# EAGLE board model140 (EAGLE 7.7.0)
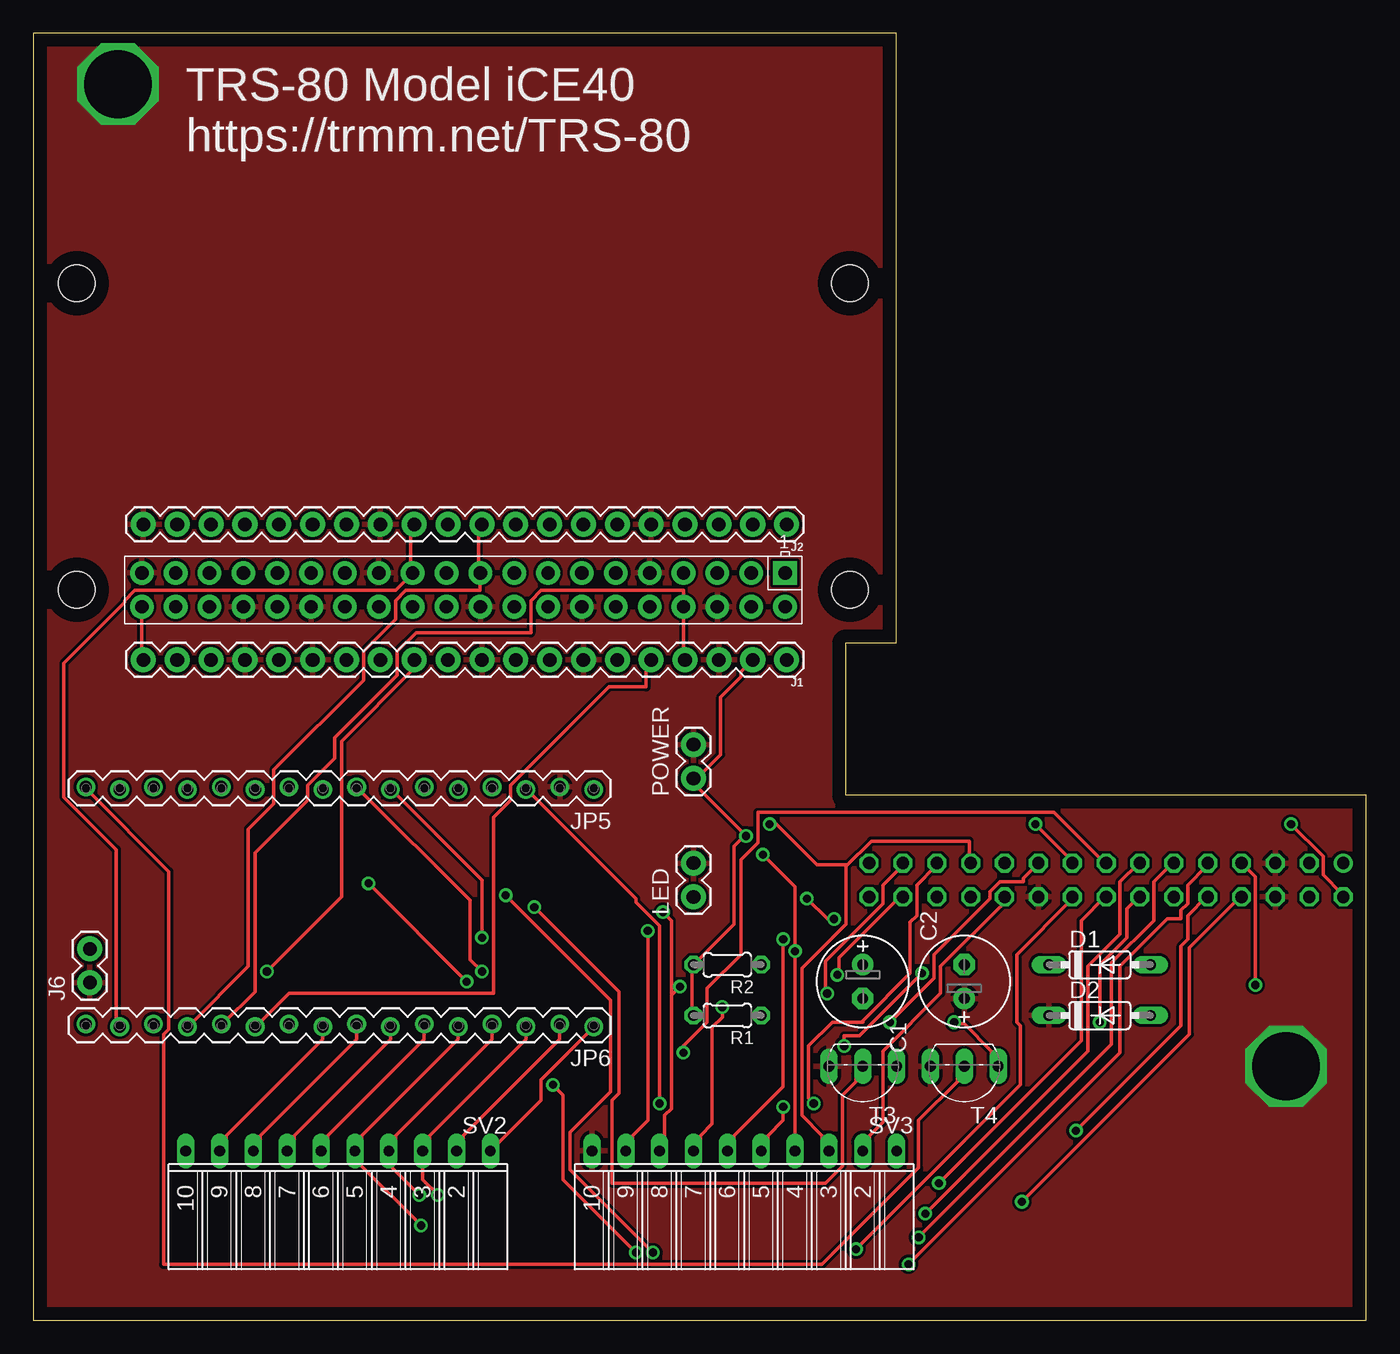
[diagram p0: board, top side]
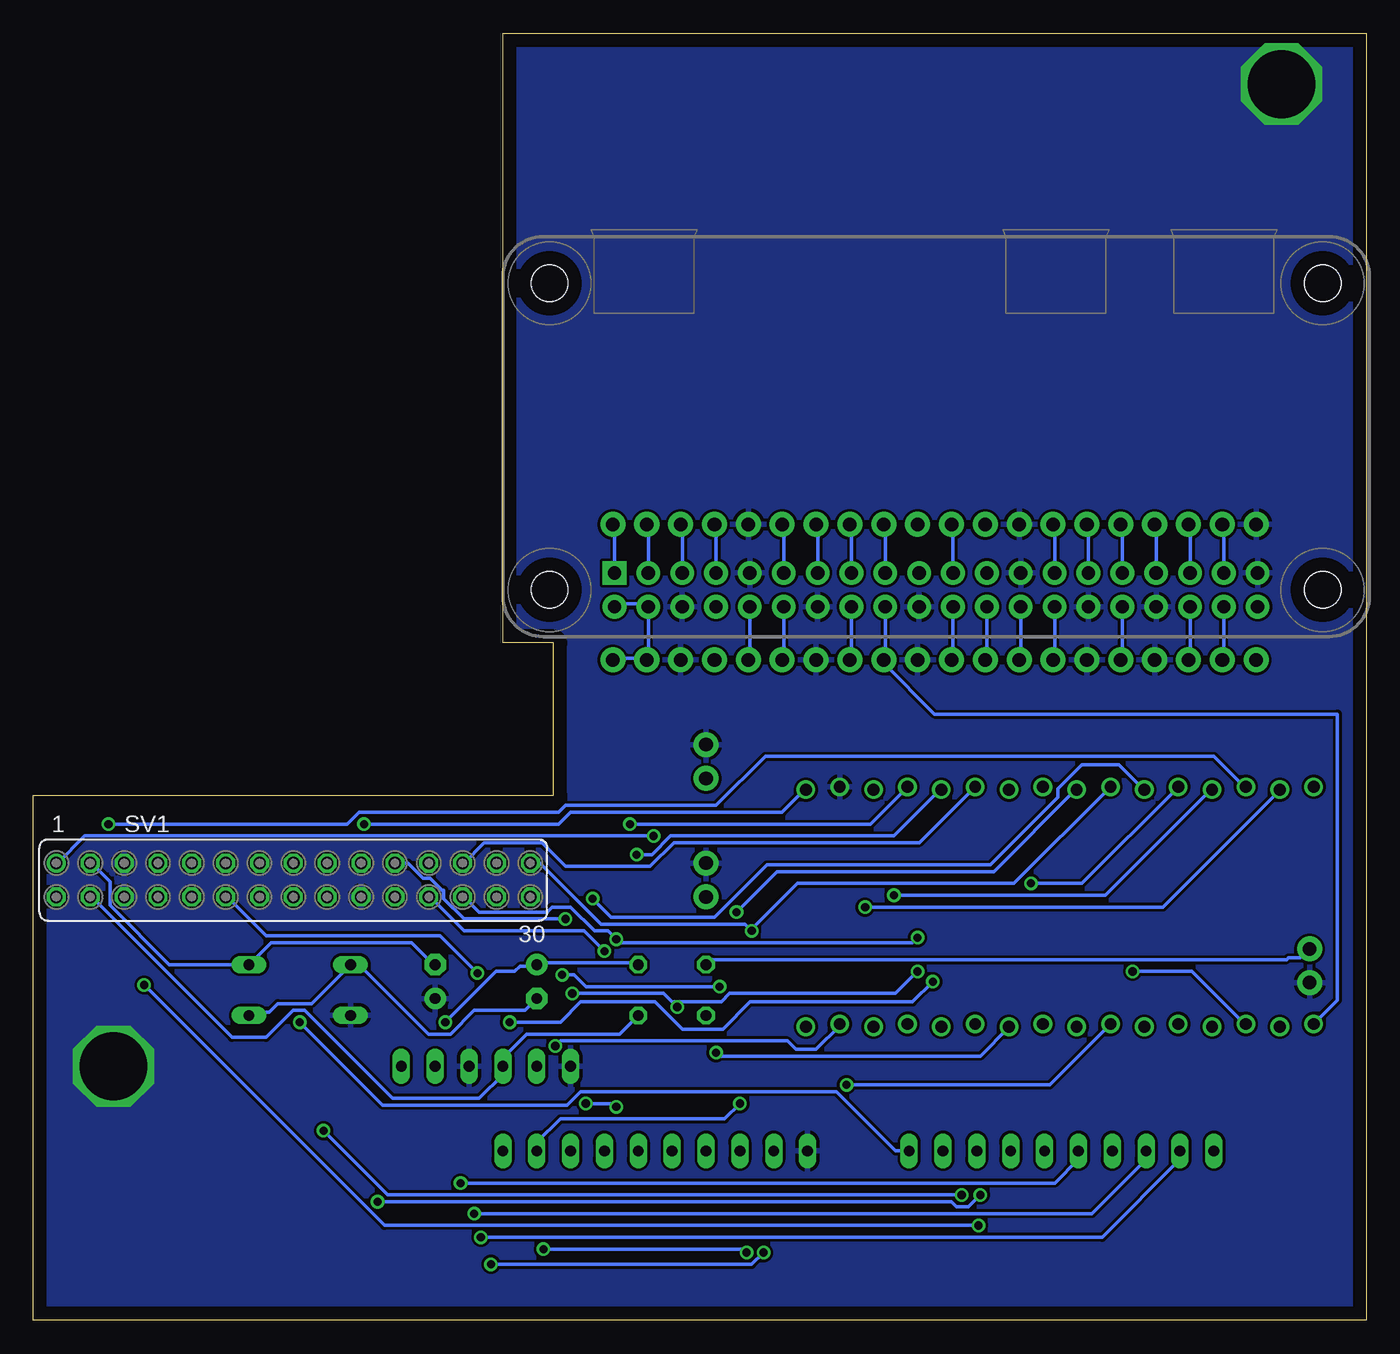
[diagram p1: board, bottom side, seen from below]

Size 100 x 96.52 mm. Coordinates in mm from the lower left corner, seen from the top.
Outline: 0,0 100,0 100,39.36 60.96,39.36 60.96,50.8 64.77,50.8 64.77,96.52 0,96.51 0,0
Copper layers (1*16): Top 0.035mm / dielectric 1.5mm / Bottom 0.035mm
Design rules "default": minimum track width 10mil, minimum drill 24mil, track to track 8mil, track to pad 8mil, pad to pad 8mil, via to via 8mil, smd to smd 8mil, copper to edge 40mil, drill to drill 8mil, minimum pad ring 10mil, minimum via ring 8mil, stop-mask expansion 4mil, vias tented up to drill 0mil, thermal gap 10mil

## Footprints (pad centres in the part's own frame; a part is rotated, then mirrored left to right if it is on the bottom)
E2,5-7 = drill 0.813 pad 1.6: + -1.27,0 | drill 0.813 pad 1.6 octagon: - 1.27,0
DO35-7 = drill 0.813 long: A 3.81,0; C -3.81,0
1X20 = drill 1.016 pad 1.88: 1 0,0; 2 2.54,0; 3 5.08,0; 4 7.62,0; 5 10.16,0; 6 12.7,0; 7 15.24,0; 8 17.78,0; 9 20.32,0; 10 22.86,0; 11 25.4,0; 12 27.94,0; 13 30.48,0; 14 33.02,0; 15 35.56,0; 16 38.1,0; 17 40.64,0; 18 43.18,0; 19 45.72,0; 20 48.26,0
1X02 = drill 1.016 pad 1.88: 1 0,0; 2 2.54,0
1X16_MACHINE-PIN-HEADER_LOCK.004@1 = drill 0.889: 1 0,0.102; 2 2.54,-0.102; 3 5.08,0.102; 4 7.62,-0.102; 5 10.16,0.102; 6 12.7,-0.102; 7 15.24,0.102; 8 17.78,-0.102; 9 20.32,0.102; 10 22.86,-0.102; 11 25.4,0.102; 12 27.94,-0.102; 13 30.48,0.102; 14 33.02,-0.102; 15 35.56,0.102; 16 38.1,-0.102
0204/5 = drill 0.813 octagon: 1 -2.54,0; 2 2.54,0
FE15-2 = drill 0.914: 1 -17.78,1.27 | drill 0.914 octagon: 2 -17.78,-1.27; 3 -15.24,1.27; 4 -15.24,-1.27; 5 -12.7,1.27; 6 -12.7,-1.27; 7 -10.16,1.27; 8 -10.16,-1.27; 9 -7.62,1.27; 10 -7.62,-1.27; 11 -5.08,1.27; 12 -5.08,-1.27; 13 -2.54,1.27; 14 -2.54,-1.27; 15 0,1.27; 16 0,-1.27; 17 2.54,1.27; 18 2.54,-1.27; 19 5.08,1.27; 20 5.08,-1.27; 21 7.62,1.27; 22 7.62,-1.27; 23 10.16,1.27; 24 10.16,-1.27; 25 12.7,1.27; 26 12.7,-1.27; 27 15.24,1.27; 28 15.24,-1.27; 29 17.78,1.27; 30 17.78,-1.27
FE10W = drill 0.813 long: 1 -11.43,0; 2 -8.89,0; 3 -6.35,0; 4 -3.81,0; 5 -1.27,0; 6 1.27,0; 7 3.81,0; 8 6.35,0; 9 8.89,0; 10 11.43,0
TO92-CBE = drill 0.813 long: B 0,0; C -2.54,0; E 2.54,0
RASP_PI_ZERO_BOARD_FULL = drill 1 pad 1.778 square: 1 8.37,25.23 | drill 1 pad 1.778: 2 8.37,27.77; 3 10.91,25.23; 4 10.91,27.77; 5 13.45,25.23; 6 13.45,27.77; 7 15.99,25.23; 8 15.99,27.77; 9 18.53,25.23; 10 18.53,27.77; 11 21.07,25.23; 12 21.07,27.77; 13 23.61,25.23; 14 23.61,27.77; 15 26.15,25.23; 16 26.15,27.77; 17 28.69,25.23; 18 28.69,27.77; 19 31.23,25.23; 20 31.23,27.77; 21 33.77,25.23; 22 33.77,27.77; 23 36.31,25.23; 24 36.31,27.77; 25 38.85,25.23; 26 38.85,27.77; 27 41.39,25.23; 28 41.39,27.77; 29 43.93,25.23; 30 43.93,27.77; 31 46.47,25.23; 32 46.47,27.77; 33 49.01,25.23; 34 49.01,27.77; 35 51.55,25.23; 36 51.55,27.77; 37 54.09,25.23; 38 54.09,27.77; 39 56.63,25.23; 40 56.63,27.77 | hole 2.75: 3.5,3.5; 3.5,26.5; 61.5,3.5; 61.5,26.5

## Placement (x,y rotation side)
C1  [E2,5-7]  62.23,25.4 270 top
C2  [E2,5-7]  69.85,25.4 90 top
D1  1N4148DO35-7  [DO35-7]  80.01,26.67 0 top
D2  1N4148DO35-7  [DO35-7]  80.01,22.86 0 top
J1  [1X20]  56.52,49.53 180 top
J2  [1X20]  56.52,59.69 180 top
J6  [1X02]  4.24,25.32 90 top
JP5  M16MACHIINE-PIN_LOCK  [1X16_MACHINE-PIN-HEADER_LOCK.004@1]  42.04,39.9 180 top
JP6  M16MACHIINE-PIN_LOCK  [1X16_MACHINE-PIN-HEADER_LOCK.004@1]  42.04,22.12 180 top
LED  [1X02]  49.53,31.75 90 top
POWER  [1X02]  49.53,40.64 90 top
R1  [0204/5]  52.07,22.86 180 top
R2  [0204/5]  52.07,26.67 180 top
SV1  [FE15-2]  80.49,33.02 0 bottom
SV2  [FE10W]  22.86,12.7 180 top
SV3  [FE10W]  53.34,12.7 180 top
T3  [TO92-CBE]  62.23,19.05 180 top
T4  [TO92-CBE]  69.85,19.05 180 top
U$1  RPI-ZERO  [RASP_PI_ZERO_BOARD_FULL]  64.77,81.28 180 top

## Library data of the parts
C1 C2 R1 R2 = rcl
D1 D2 = diode
J1 J2 J6 JP5 JP6 LED POWER = SparkFun-Connectors
SV1-SV3 = con-lsta; OC_FARNELL: unknown; OC_NEWARK: unknown
T3 T4 = transistor
U$1 = rpi-zero

## Nets
3V3@1: J2.1 U$1.1
3V3@2: J2.9 U$1.17
+3V3: JP5.1 SV1.17
+5V: J1.1 J1.2 J6.2 POWER.1 R1.2 R2.2 SV1.1 U$1.2 U$1.4
-5V: C2.- D1.A SV1.3
GND: C2.+ D2.C J1.3 J1.7 J1.10 J1.15 J1.17 J2.5 J2.13 J2.20 J6.1 JP5.2 LED.2 POWER.2 SV1.5 SV1.6 SV1.20 SV3.10 T3.E T4.E U$1.6 U$1.9 U$1.14 U$1.20 U$1.25 U$1.30 U$1.34 U$1.39
LCD_BZ: JP5.14 SV1.2
LCD_CONTRAST: R1.1 SV1.4 T3.C
LCD_CS1: JP5.13 SV1.18
LCD_CS20: JP6.1 SV1.14 SV2.1
LCD_CS21: JP6.2 SV1.12 SV2.2
LCD_CS22: JP6.3 SV1.10 SV2.3
LCD_CS23: JP6.4 SV1.8 SV2.4
LCD_CS24: JP6.5 SV1.7 SV2.5
LCD_CS25: JP6.6 SV1.16 SV2.6
LCD_CS26: JP6.7 SV1.15 SV2.7
LCD_CS27: JP6.8 SV1.13 SV2.8
LCD_CS28: JP6.9 SV1.11 SV2.9
LCD_CS29: JP6.10 SV1.9
LCD_D0: JP5.3 SV1.22 SV3.2
LCD_D1: JP5.4 SV1.23 SV3.3
LCD_D2: JP5.5 SV1.24 SV3.4
LCD_D3: JP5.6 SV1.25 SV3.5
LCD_D4: JP5.7 SV1.26 SV3.6
LCD_D5: JP5.8 SV1.27 SV3.7
LCD_D6: JP5.9 SV1.28 SV3.8
LCD_D7: JP5.10 SV1.29 SV3.9
LCD_DI: JP5.11 SV1.21
LCD_E: JP5.12 SV1.19
LED: LED.1
N$1: J2.2 U$1.3
N$2: J2.3 U$1.5
N$3: J2.4 U$1.7
N$4: J2.6 U$1.11
N$5: J2.7 U$1.13
N$6: J2.8 U$1.15
N$7: J2.11 U$1.21
N$8: J2.14 U$1.27
N$9: J2.15 U$1.29
N$10: J2.16 U$1.31
N$11: J2.17 U$1.33
N$12: J2.18 U$1.35
N$13: J2.19 U$1.37
N$14: J1.20 U$1.40
N$15: J1.19 U$1.38
N$16: J1.18 U$1.36
N$17: J1.16 U$1.32
N$18: J1.14 U$1.28
N$19: J1.13 U$1.26
N$20: J1.11 U$1.22
N$21: J1.8 U$1.16
N$22: J1.6 U$1.12
N$27: C1.+ R2.1 T4.C
N$28: C1.- D1.C D2.A
PWM_CONTRAST: JP5.15 T3.B
PWM_NEGV: JP5.16 T4.B
SERIAL_RX: J1.5 JP6.11 U$1.10
SERIAL_TX: J1.4 JP6.12 U$1.8
SPI_CLK: J2.12 JP6.15 U$1.23
SPI_CS: J1.12 JP6.14 U$1.24
SPI_DC: J1.9 JP6.16 U$1.18
SPI_DI: J2.10 JP6.13 U$1.19

## Tracks (layer width: path | path; a pad name or v marks a point on that pad's centre or on a via)
3V3@1
  Bottom 0.254: J2.1 56.39,59.69 56.39,56.13 U$1.1
3V3@2
  Bottom 0.254: J2.9 36.07,59.69 36.07,56.13 U$1.17
+3V3  (via drill 0.61)
  Top 0.254: v75.18,37.21 77.85,34.54 77.85,34.29 SV1.17
  Bottom 0.254: v75.18,37.21 60.58,37.21 59.69,38.1 43.81,38.1 42.16,39.75 JP5.1
+5V  (via drill 0.61)
  Top 0.254: R1.2 49.4,22.99 49.4,26.54 R2.2 52.58,29.72 52.58,35.56 53.34,36.32 v53.47,36.32 49.53,40.26 49.53,40.39 | J1.2 53.09,48.64 53.09,48.26 51.56,46.74 51.56,42.42 49.53,40.39 | 49.53,40.39 POWER.1
  Bottom 0.254: R2.2 49.4,26.67 49.02,27.05 5.97,27.05 5.84,27.18 4.95,27.18 4.32,27.81 J6.2 | U$1.2 56.39,53.59 56.26,53.72 54.1,53.72 53.98,53.59 U$1.4 53.85,53.47 53.85,49.66 53.98,49.66 J1.2 54.1,49.66 55.5,49.66 55.63,49.53 J1.1 | v53.47,36.32 96.14,36.32 98.17,34.29 SV1.1
-5V
  Bottom 0.254: C2.- 69.98,26.67 71.63,28.32 82.17,28.32 D1.A 89.79,26.67 94.23,31.11 94.23,32.89 95.63,34.29 SV1.3
GND  (via drill 5.08 pad 2.54)
  other vias: 6.35,92.71 93.98,19.05
  pour Bottom: 0,96.52 105.41,96.52 105.41,-1.27 0,-1.27
  pour Top: 0,96.52 104.14,96.52 104.14,0 0,0
LCD_BZ  (via drill 0.61)
  Top 0.254: v94.36,37.21 96.77,34.8 96.77,33.4 98.17,32 98.17,31.75 SV1.2
  Bottom 0.254: v94.36,37.21 76.45,37.21 75.56,38.1 60.58,38.1 60.07,38.61 48.77,38.61 45.09,42.29 11.43,42.29 9.14,40.01 JP5.14
LCD_CONTRAST
  Bottom 0.254: R1.1 56.01,21.46 62.99,21.46 64.77,19.68 T3.C 64.77,18.41 66.55,16.64 73.03,16.64 79.63,23.24 80.52,23.24 82.55,21.21 85.09,21.21 95.63,31.75 SV1.4
LCD_CS1  (via drill 0.61)
  Top 0.254: v35.43,31.88 43.31,24 43.31,17.14 40.26,14.1 40.26,11.3 v46.48,5.08 | v61.72,5.33 74.04,17.65 74.04,22.1 73.79,22.35 73.79,27.43 77.85,31.5 77.85,31.75 SV1.18
  Bottom 0.254: v35.43,31.88 19.56,31.88 11.68,39.75 JP5.13 | v46.48,5.08 46.74,5.33 v61.72,5.33
LCD_CS20  (via drill 0.61)
  Top 0.254: SV2.1 38.1,16.51 38.1,18.03 42.04,21.97 JP6.1 | v80.01,22.35 80.01,26.67 82.04,28.7 82.04,30.86 82.93,31.75 SV1.14
  Bottom 0.254: v80.01,22.35 73.79,16.13 59.94,16.13 58.93,17.14 39.75,17.14 35.31,12.7 SV2.1
LCD_CS21  (via drill 0.61)
  Top 0.254: SV2.2 32.26,13.21 32.26,13.84 39.5,21.08 39.5,22.1 JP6.2 | v66.67,26.04 61.98,21.34 60.83,21.34 v60.83,20.57
  Bottom 0.254: v66.67,26.04 69.47,28.83 82.55,28.83 85.47,31.75 SV1.12 | v60.83,20.57 60.45,20.95 43.43,20.95 42.8,20.32 41.27,20.32 39.5,22.1 JP6.2
LCD_CS22  (via drill 0.61)
  Top 0.254: JP6.3 36.96,21.97 36.96,21.08 29.72,13.84 29.72,13.21 SV2.3 29.21,10.54 v30.35,9.4 | v78.23,14.22 86.11,22.1 86.11,28.07 86.61,28.57 86.61,30.35 88.01,31.75 SV1.10
  Bottom 0.254: v78.23,14.22 73.41,9.4 v30.35,9.4
LCD_CS23  (via drill 0.61)
  Top 0.254: JP6.4 34.42,22.1 34.42,21.08 27.18,13.84 27.18,13.21 SV2.4 26.8,12.7 26.8,11.56 v28.96,9.4 | v74.17,8.89 86.74,21.46 86.74,27.94 90.55,31.75 SV1.8
  Bottom 0.254: v74.17,8.89 31.11,8.89 30.73,8.51 29.84,8.51 v28.96,9.4
LCD_CS24  (via drill 0.61)
  Top 0.254: JP6.5 31.88,21.97 31.88,21.08 24.64,13.84 24.64,13.21 SV2.5 24.26,12.7 24.26,11.94 v29.08,7.11 | v91.69,25.15 91.69,33.27 90.68,34.29 SV1.7
  Bottom 0.254: v91.69,25.15 73.66,7.11 v29.08,7.11
LCD_CS25  (via drill 0.61)
  Top 0.254: SV2.6 22.1,13.21 22.1,13.84 29.34,21.08 29.34,22.1 JP6.6 | v67.94,10.29 78.61,20.95 78.61,29.97 80.39,31.75 SV1.16
  Bottom 0.254: v67.94,10.29 23.37,10.29 21.59,12.06 SV2.6
LCD_CS26  (via drill 0.61)
  Top 0.254: SV2.7 19.56,13.21 19.56,13.84 26.8,21.08 26.8,21.97 JP6.7 | v48.77,20.07 48.77,20.57 50.55,22.35 50.55,24.89 53.09,27.43 53.09,34.54 54.36,35.81 54.36,38.1 76.58,38.1 80.39,34.29 SV1.15
  Bottom 0.254: v48.77,20.07 48.51,19.81 28.96,19.81 26.8,21.97 JP6.7
LCD_CS27  (via drill 0.61)
  Top 0.254: SV2.8 17.02,13.21 17.02,13.84 24.26,21.08 24.26,22.1 JP6.8 | v66.93,8 79.12,20.19 79.12,26.54 81.53,28.96 81.53,32.89 82.93,34.29 SV1.13
  Bottom 0.254: v66.93,8 20.57,8 16.51,12.06 SV2.8
LCD_CS28  (via drill 0.61)
  Top 0.254: SV2.9 14.48,13.21 14.48,13.84 21.72,21.08 21.72,21.97 JP6.9 | v66.42,6.22 80.9,20.7 80.9,26.8 84.07,29.97 84.07,32.89 85.47,34.29 SV1.11
  Bottom 0.254: v66.42,6.22 19.81,6.22 13.97,12.06 SV2.9
LCD_CS29  (via drill 0.61)
  Top 0.254: v38.99,17.65 39.75,16.89 39.75,10.54 v45.21,5.08 | v65.66,4.19 81.53,20.07 81.53,26.54 85.09,30.1 86.11,30.1 86.11,30.73 86.61,31.24 86.61,32.64 88.01,34.04 88.01,34.29 SV1.9
  Bottom 0.254: v38.99,17.65 23.75,17.65 19.3,22.1 JP6.10 | v45.21,5.08 46.1,4.19 v65.66,4.19
LCD_D0  (via drill 0.61)
  Top 0.254: SV3.2 62.74,13.21 62.74,13.84 63.75,14.86 63.75,20.19 68.07,24.51 68.07,26.54 72.77,31.24 72.77,31.75 SV1.22 | v46.99,16.26 46.99,29.59 45.21,31.37 45.21,31.62 37.08,39.75 JP5.3
  Bottom 0.254: v46.99,16.26 48.13,15.11 60.45,15.11 62.23,13.34 SV3.2
LCD_D1  (via drill 0.61)
  Top 0.254: SV3.3 59.18,13.21 59.18,13.84 57.66,15.37 57.66,26.42 60.96,29.72 60.96,34.04 61.02,34.1 | 61.02,34.1 62.87,35.94 70.23,35.94 70.23,34.29 SV1.23 | v55.24,37.21 55.75,37.21 58.8,34.16 60.96,34.16 61.02,34.1
  Bottom 0.254: v55.24,37.21 37.21,37.21 34.54,39.88 JP5.4
LCD_D2  (via drill 0.61)
  Top 0.254: SV3.4 v57.15,27.69 57.15,32.51 v54.74,34.92
  Bottom 0.254: v57.15,27.69 58.67,29.21 67.69,29.21 70.23,31.75 SV1.24 | v54.74,34.92 53.59,34.92 52.2,36.32 35.43,36.32 32,39.75 JP5.5
LCD_D3  (via drill 0.61)
  Top 0.254: SV3.5 55.12,13.21 55.12,13.84 56.26,14.99 v56.26,16 | v58.55,16.26 58.17,16.64 58.17,20.57 59.94,22.35 62.23,22.35 62.23,22.48 65.79,26.04 65.79,29.84 66.29,30.35 66.29,32.64 67.69,34.04 67.69,34.29 SV1.25
  Bottom 0.254: v56.26,16 56.52,16.26 v58.55,16.26 | JP5.6 29.46,39.88 33.53,35.81 51.94,35.81 53.72,34.04 60.07,34.04 61.85,35.81 66.17,35.81 67.69,34.29 SV1.25
LCD_D4  (via drill 0.61)
  Top 0.254: SV3.6 52.58,13.21 52.58,13.84 56.26,17.53 v56.26,28.57 | v33.66,28.7 33.66,33.02 26.92,39.75 JP5.7
  Bottom 0.254: SV1.26 67.69,31.75 66.55,30.61 61.47,30.61 61.09,30.99 59.69,30.99 57.91,29.21 56.9,29.21 v56.26,28.57 56.01,28.32 34.04,28.32 v33.66,28.7
LCD_D5  (via drill 0.61)
  Top 0.254: SV3.7 50.04,13.21 50.04,13.84 50.93,14.73 50.93,21.97 51.69,22.73 v51.69,23.5 | v59.56,24.51 59.44,24.64 59.44,26.92 63.75,31.24 63.75,32.64 65.15,34.04 65.15,34.29 SV1.27 | v33.66,26.16 32.77,27.05 32.77,31.5 24.38,39.88 JP5.8
  Bottom 0.254: v59.56,24.51 52.7,24.51 v51.69,23.5 51.94,23.88 48.39,23.88 47.75,24.51 35.31,24.51 v33.66,26.16
LCD_D6  (via drill 0.61)
  Top 0.254: SV3.8 47.37,13.08 47.37,15.37 47.88,15.88 47.88,24.38 47.94,24.45 | v48.51,25.02 47.94,24.45 | v60.33,25.91 60.45,26.04 60.45,27.18 65.02,31.75 SV1.28 | v47.24,30.61 47.88,29.97 47.88,24.51 47.94,24.45
  Bottom 0.254: v48.51,25.02 58.55,25.02 59.44,25.91 v60.33,25.91 | v47.24,30.61 44.2,33.66 27.94,33.66 21.84,39.75 JP5.9
LCD_D7  (via drill 0.61)
  Top 0.254: SV3.9 44.96,13.21 44.96,13.84 46.1,14.99 v46.1,29.21
  Bottom 0.254: SV1.29 61.98,34.29 57.4,29.72 46.61,29.72 v46.1,29.21 46.1,29.34 42.67,32.77 26.42,32.77 19.3,39.88 JP5.10
LCD_DI  (via drill 0.61)
  Top 0.254: v58.04,31.62 59.56,30.1 v60.07,30.1
  Bottom 0.254: v58.04,31.62 56.64,30.23 48.9,30.23 44.96,34.16 28.19,34.16 23.11,39.24 23.11,39.88 21.34,41.66 18.54,41.66 16.76,39.88 JP5.11 | v60.07,30.1 67.69,30.1 69.22,31.62 69.22,32.26 69.34,32.26 70.23,33.15 70.74,33.15 71.88,34.29 SV1.21
LCD_E  (via drill 0.61)
  Top 0.254: v32.51,25.4 v25.15,32.77 | v64.26,22.35 67.56,25.65 67.56,27.43 71.75,31.62 71.75,32.13 72.52,32.89 74.3,32.89 74.3,33.15 75.31,34.16 75.31,34.29 SV1.19
  Bottom 0.254: v25.15,32.77 21.34,32.77 14.22,39.88 JP5.12 | v32.51,25.4 34.04,23.88 46.23,23.88 48.26,21.84 51.31,21.84 53.34,23.88 58.93,23.88 60.45,22.35 v64.26,22.35
N$1
  Bottom 0.254: J2.2 53.85,59.69 53.85,56.13 U$1.3
N$2
  Bottom 0.254: J2.3 51.31,59.69 51.31,56.13 U$1.5
N$3
  Bottom 0.254: J2.4 48.77,59.69 48.77,56.13 U$1.7
N$4
  Bottom 0.254: J2.6 43.69,59.69 43.69,56.13 U$1.11
N$5
  Bottom 0.254: J2.7 41.15,59.69 41.15,56.13 U$1.13
N$6
  Bottom 0.254: J2.8 38.61,59.69 38.61,56.13 U$1.15
N$7
  Bottom 0.254: J2.11 30.99,59.69 30.99,56.13 U$1.21
N$8
  Bottom 0.254: J2.14 23.37,59.69 23.37,56.13 U$1.27
N$9
  Bottom 0.254: J2.15 20.83,59.69 20.83,56.13 U$1.29
N$10
  Bottom 0.254: J2.16 18.29,59.69 18.29,56.13 U$1.31
N$11
  Bottom 0.254: J2.17 15.75,59.69 15.75,56.13 U$1.33
N$12
  Bottom 0.254: J2.18 13.21,59.69 13.21,56.13 U$1.35
N$13
  Bottom 0.254: J2.19 10.67,59.69 10.67,56.13 U$1.37
N$14
  Top 0.254: J1.20 8.13,49.66 8.13,53.47 U$1.40
N$15
  Bottom 0.254: J1.19 10.67,49.53 10.67,53.47 U$1.38
N$16
  Bottom 0.254: J1.18 13.21,49.53 13.21,53.47 U$1.36
N$17
  Bottom 0.254: J1.16 18.29,49.53 18.29,53.47 U$1.32
N$18
  Bottom 0.254: J1.14 23.37,49.53 23.37,53.47 U$1.28
N$19
  Bottom 0.254: J1.13 25.91,49.53 25.91,53.47 U$1.26
N$20
  Bottom 0.254: J1.11 30.99,49.53 30.99,53.47 U$1.22
N$21
  Bottom 0.254: J1.8 38.61,49.53 38.61,53.47 U$1.16
N$22
  Bottom 0.254: J1.6 43.69,49.53 43.69,53.47 U$1.12
N$27  (via drill 0.61)
  Top 0.254: T4.C 71.88,19.56 71.88,20.19 69.85,22.23 69.09,22.23 v69.09,22.35
  Bottom 0.254: v69.09,22.35 65.28,26.16 63.88,26.16 63.5,26.54 62.36,26.54 C1.+ 62.1,26.8 54.74,26.8 R2.1
N$28
  Bottom 0.254: D2.A 82.8,22.86 82.55,23.11 82.3,23.11 81.66,23.75 79.12,23.75 D1.C 76.2,26.54 75.44,26.54 70.36,21.46 68.71,21.46 66.93,23.24 63.12,23.24 C1.-
PWM_CONTRAST  (via drill 0.61)
  Top 0.254: T3.B 61.72,18.54 61.72,17.91 60.71,16.89 60.71,11.56 59.44,10.29 43.43,10.29 43.43,16.51 43.94,17.02 43.94,24.64 v37.59,30.99
  Bottom 0.254: v37.59,30.99 15.24,30.99 6.48,39.75 JP5.15
PWM_NEGV
  Top 0.254: T4.B 69.34,18.54 69.34,17.91 66.42,14.99 66.42,11.43 59.18,4.19 9.78,4.19 9.78,21.46 10.16,21.84 10.16,33.66 4.06,39.75 4.06,39.88 JP5.16
SERIAL_RX
  Top 0.254: J1.5 46.35,49.02 45.97,48.64 45.97,47.5 43.18,47.5 35.81,40.13 35.81,38.99 34.54,37.72 34.54,24.51 19.18,24.51 16.76,22.1 JP6.11
  Bottom 0.254: J1.5 46.23,49.53 46.23,53.47 U$1.10
SERIAL_TX
  Top 0.254: JP6.12 14.22,22.23 16.64,24.64 16.64,35.05 20.57,38.99 20.57,40.13 22.61,42.16 22.61,43.69 27.3,48.39 27.3,50.16 28.7,51.56 37.34,51.56 37.34,53.98 38.1,54.74 48.77,54.74 48.77,53.59 U$1.8 48.77,53.47 48.77,49.66 J1.4
SPI_CLK
  Top 0.254: JP6.15 6.48,22.1 6.22,22.35 6.22,35.31 2.29,39.24 2.29,49.28 6.86,53.85 6.86,53.98 7.62,54.74 27.18,54.74 28.45,56.01 U$1.23 28.32,56.01 28.32,59.44 J2.12
SPI_CS  (via drill 0.61)
  Top 0.254: v17.53,26.16 23.11,31.75 23.11,43.43 28.57,48.9 J1.12
  Bottom 0.254: v17.53,26.16 13.08,26.16 9.14,22.23 JP6.14 | J1.12 28.45,49.53 28.45,53.47 U$1.24
SPI_DC
  Bottom 0.254: JP6.16 2.16,24 2.16,45.47 32.38,45.47 36.2,49.28 J1.9 36.07,49.53 36.07,53.47 U$1.18
SPI_DI
  Top 0.254: JP6.13 11.68,22.1 16.13,26.54 16.13,36.83 18.03,38.73 18.03,41.27 24.77,48.01 24.77,50.16 27.18,52.58 27.18,53.98 27.94,54.74 33.53,54.74 33.53,56.01 U$1.19 33.4,56.01 33.4,59.44 J2.10

## Text on the board
tNames: TRS-80 Model iCE40 | https://trmm.net/TRS-80